# Altium PCB SX1308_GTW_e381v02c.PcbDoc (part 1 of 3)
Units mil, origin at the board's own origin, x right, y up, seen from the top; angles counter-clockwise.
Board outline 2874.02 x 1220.47 mil, 4 copper layers (Top Layer, MidLayer1 - GND, MidLayer2 - Power, Bottom Layer), stack 62.441 mil thick; 180 components, 130 nets, 612 pads, 859 vias.
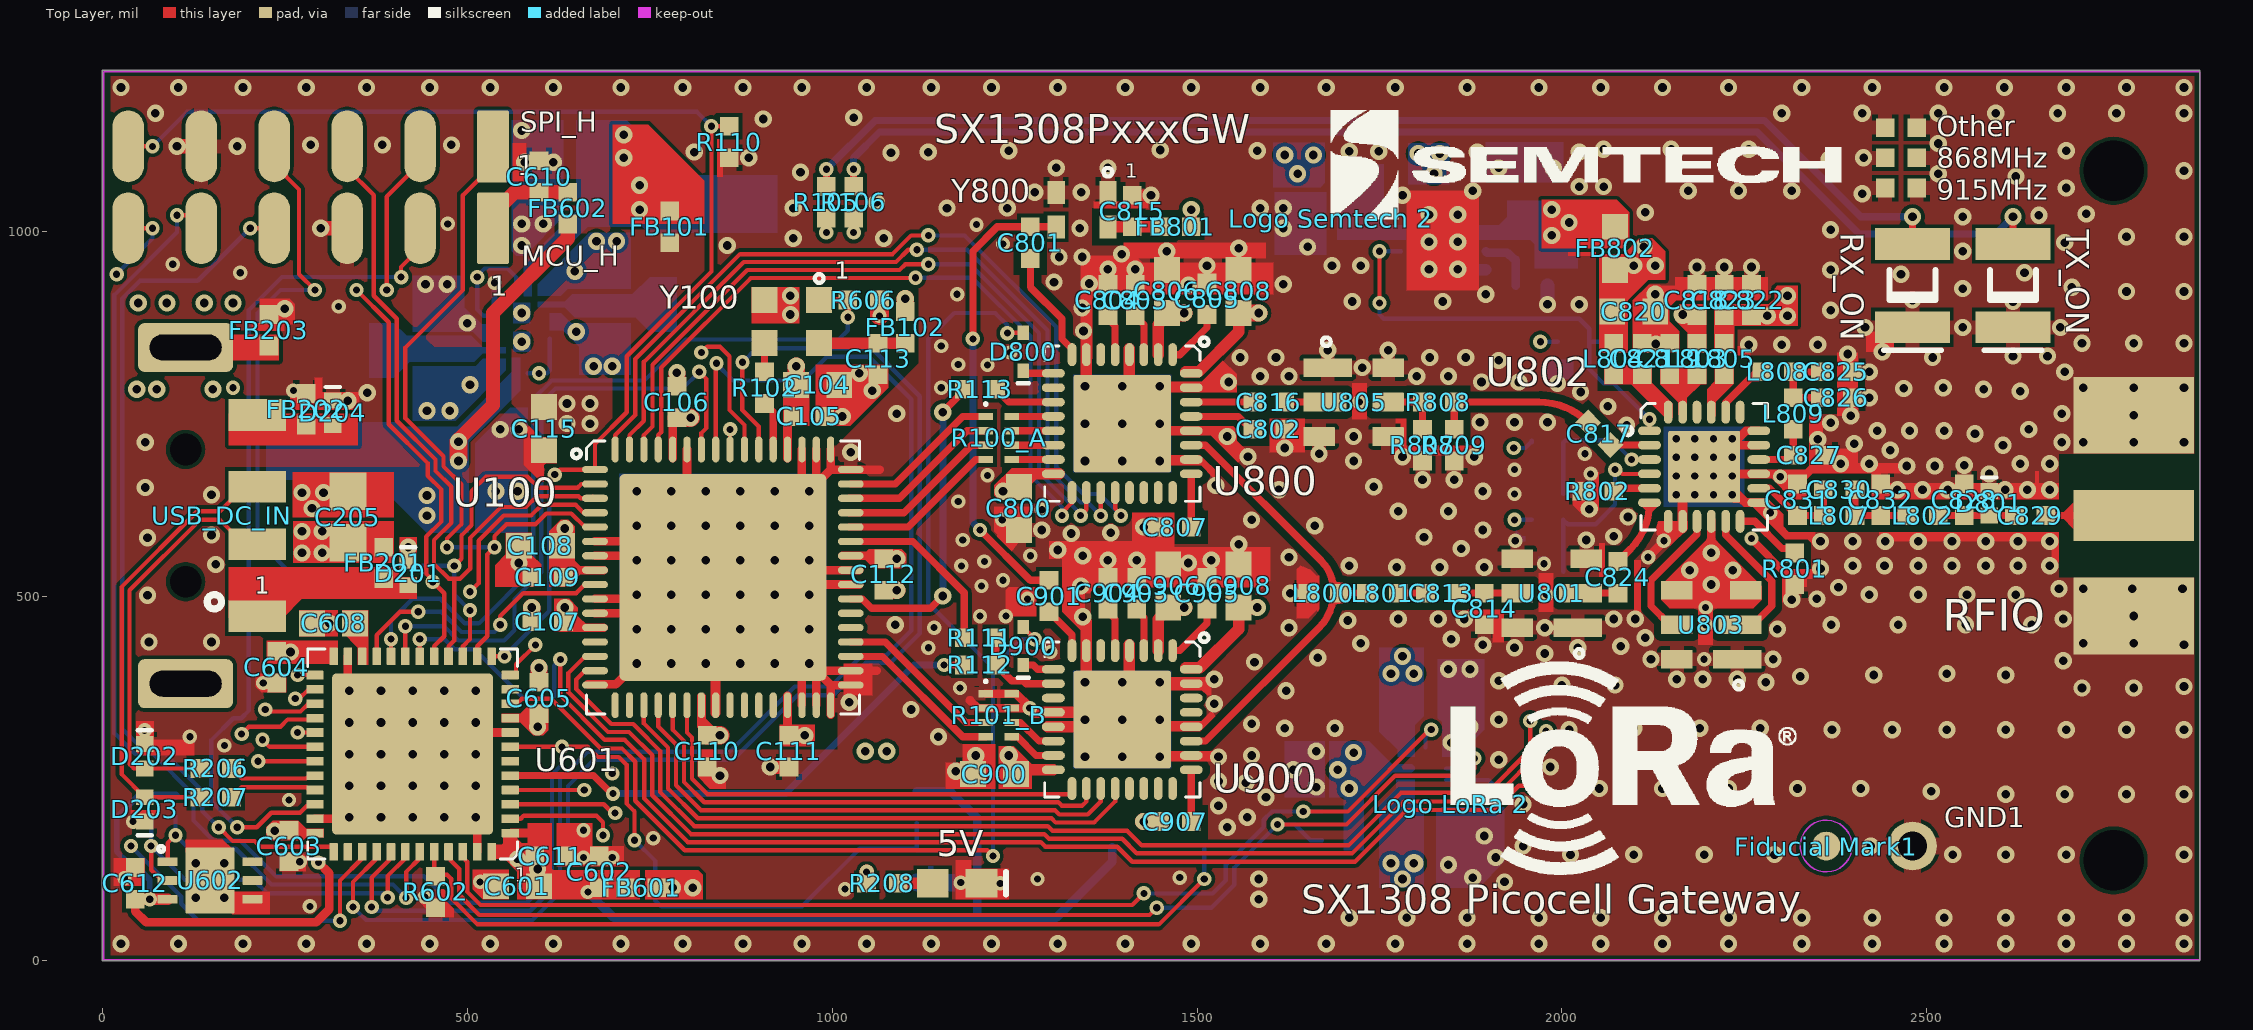
[diagram p0: Top Layer view]
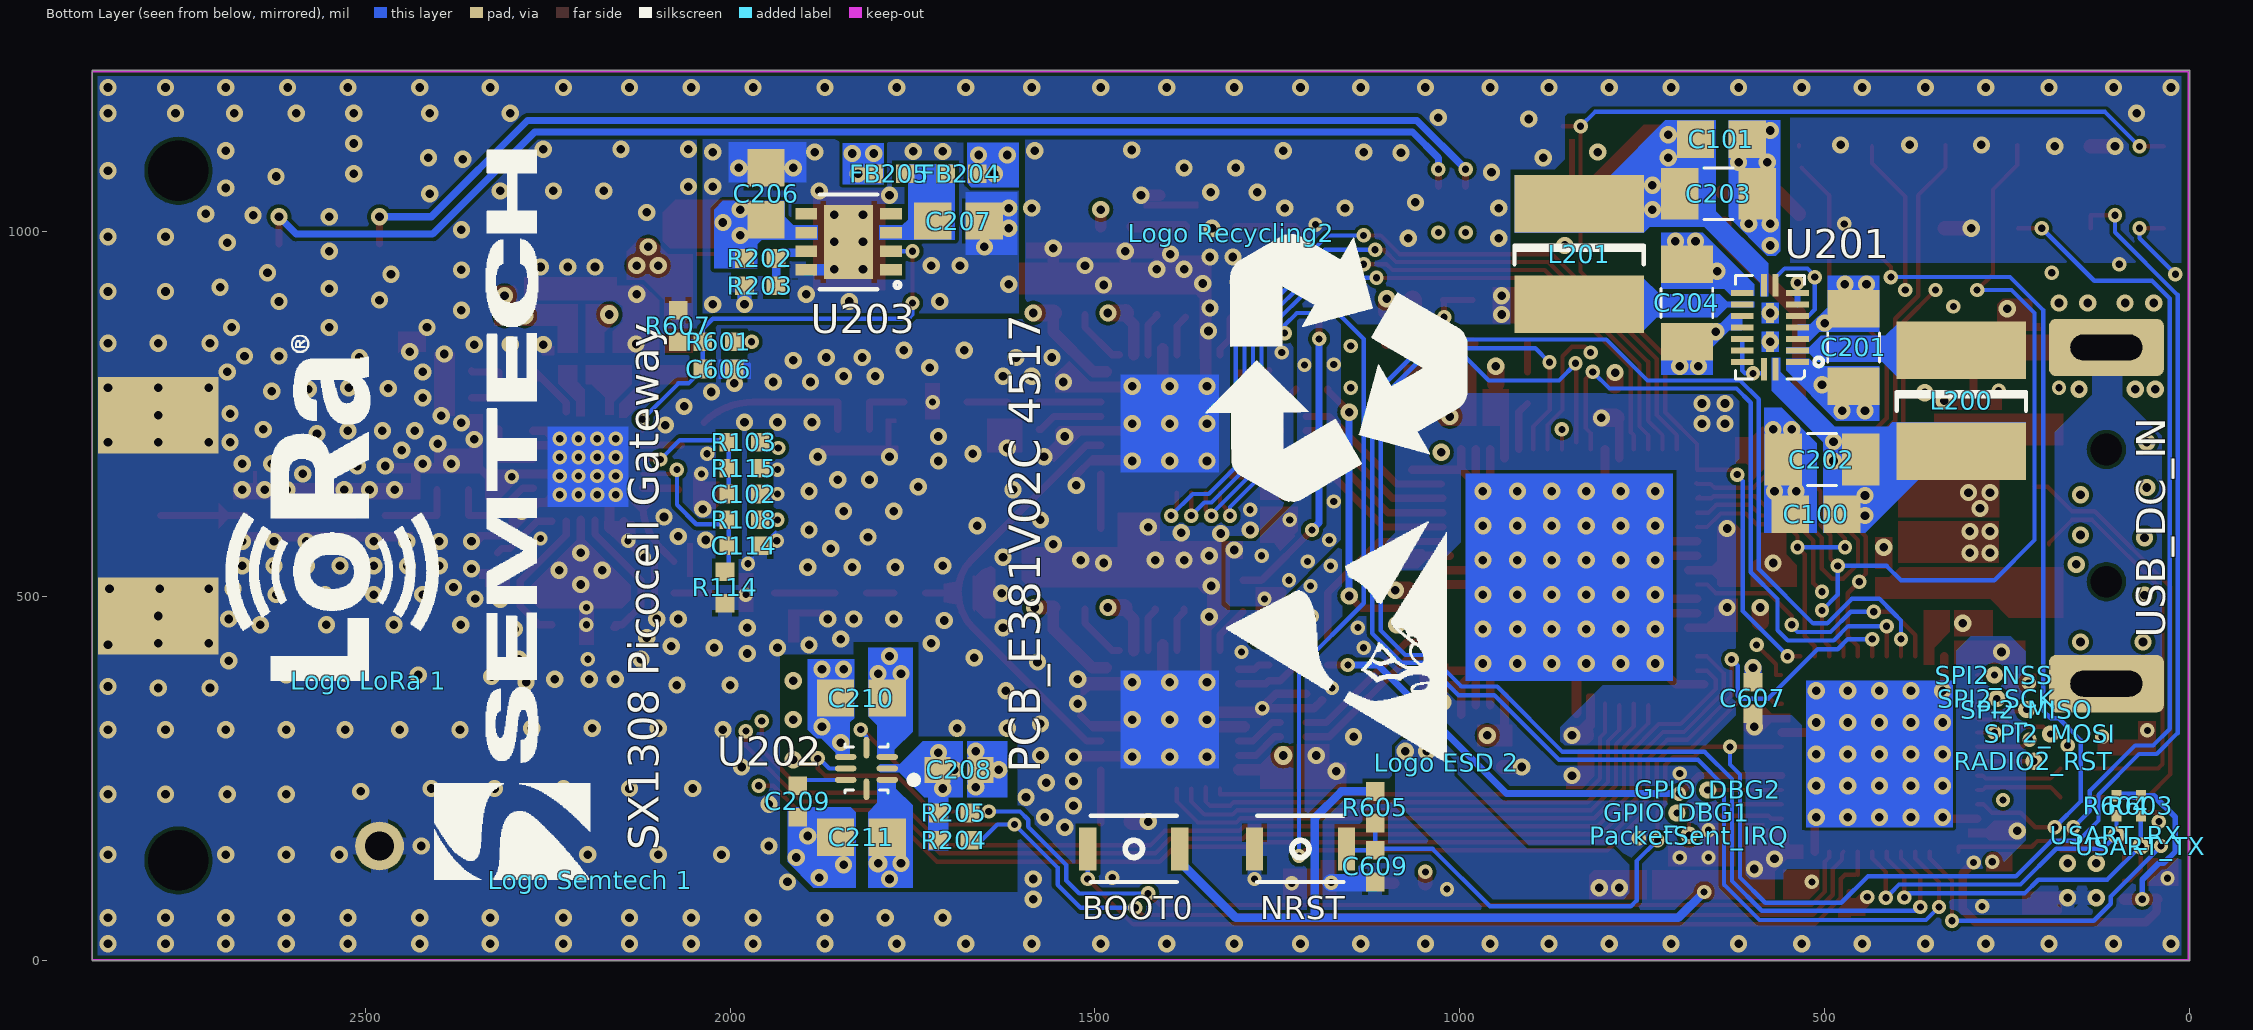
[diagram p1: Bottom Layer view, seen from below]
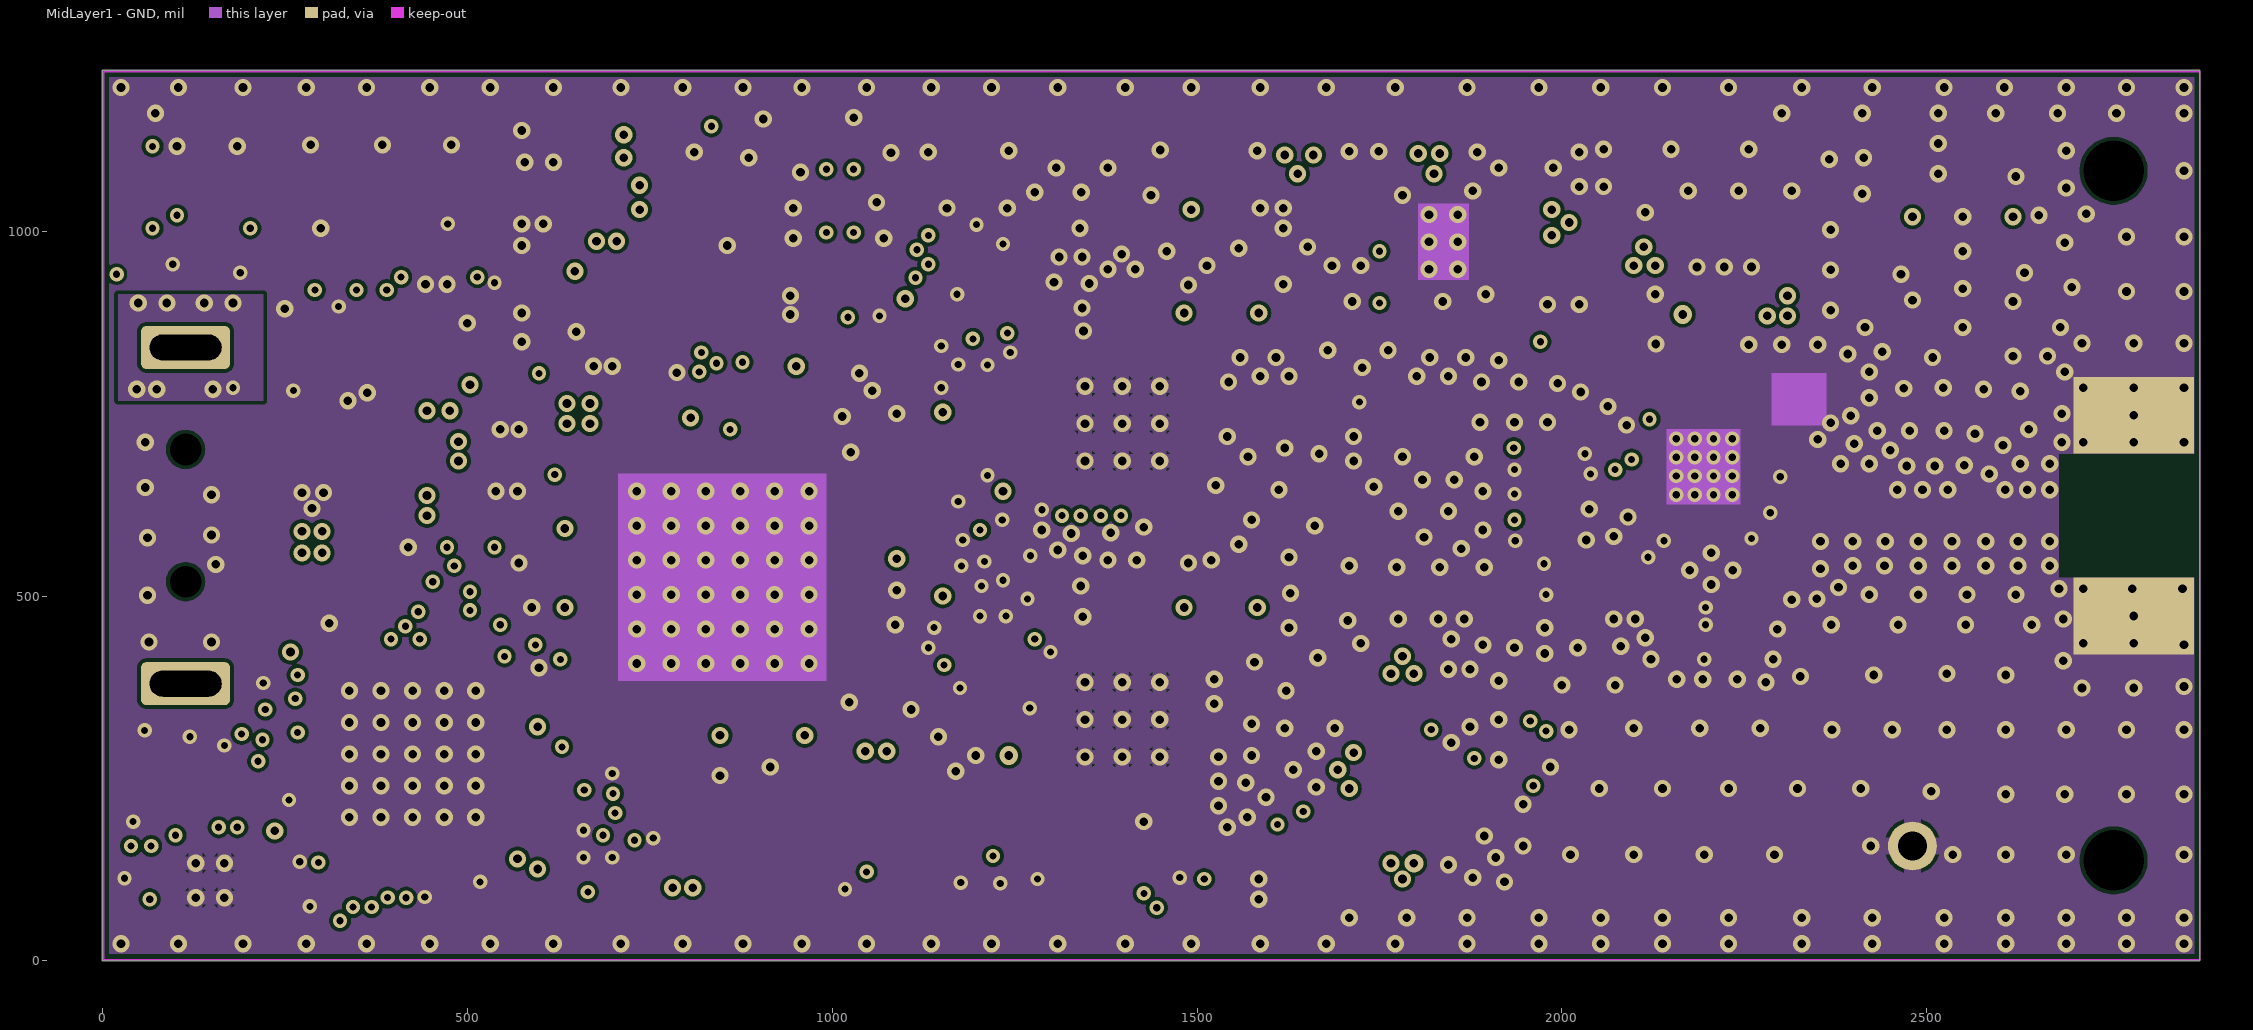
[diagram p2: MidLayer1 - GND]
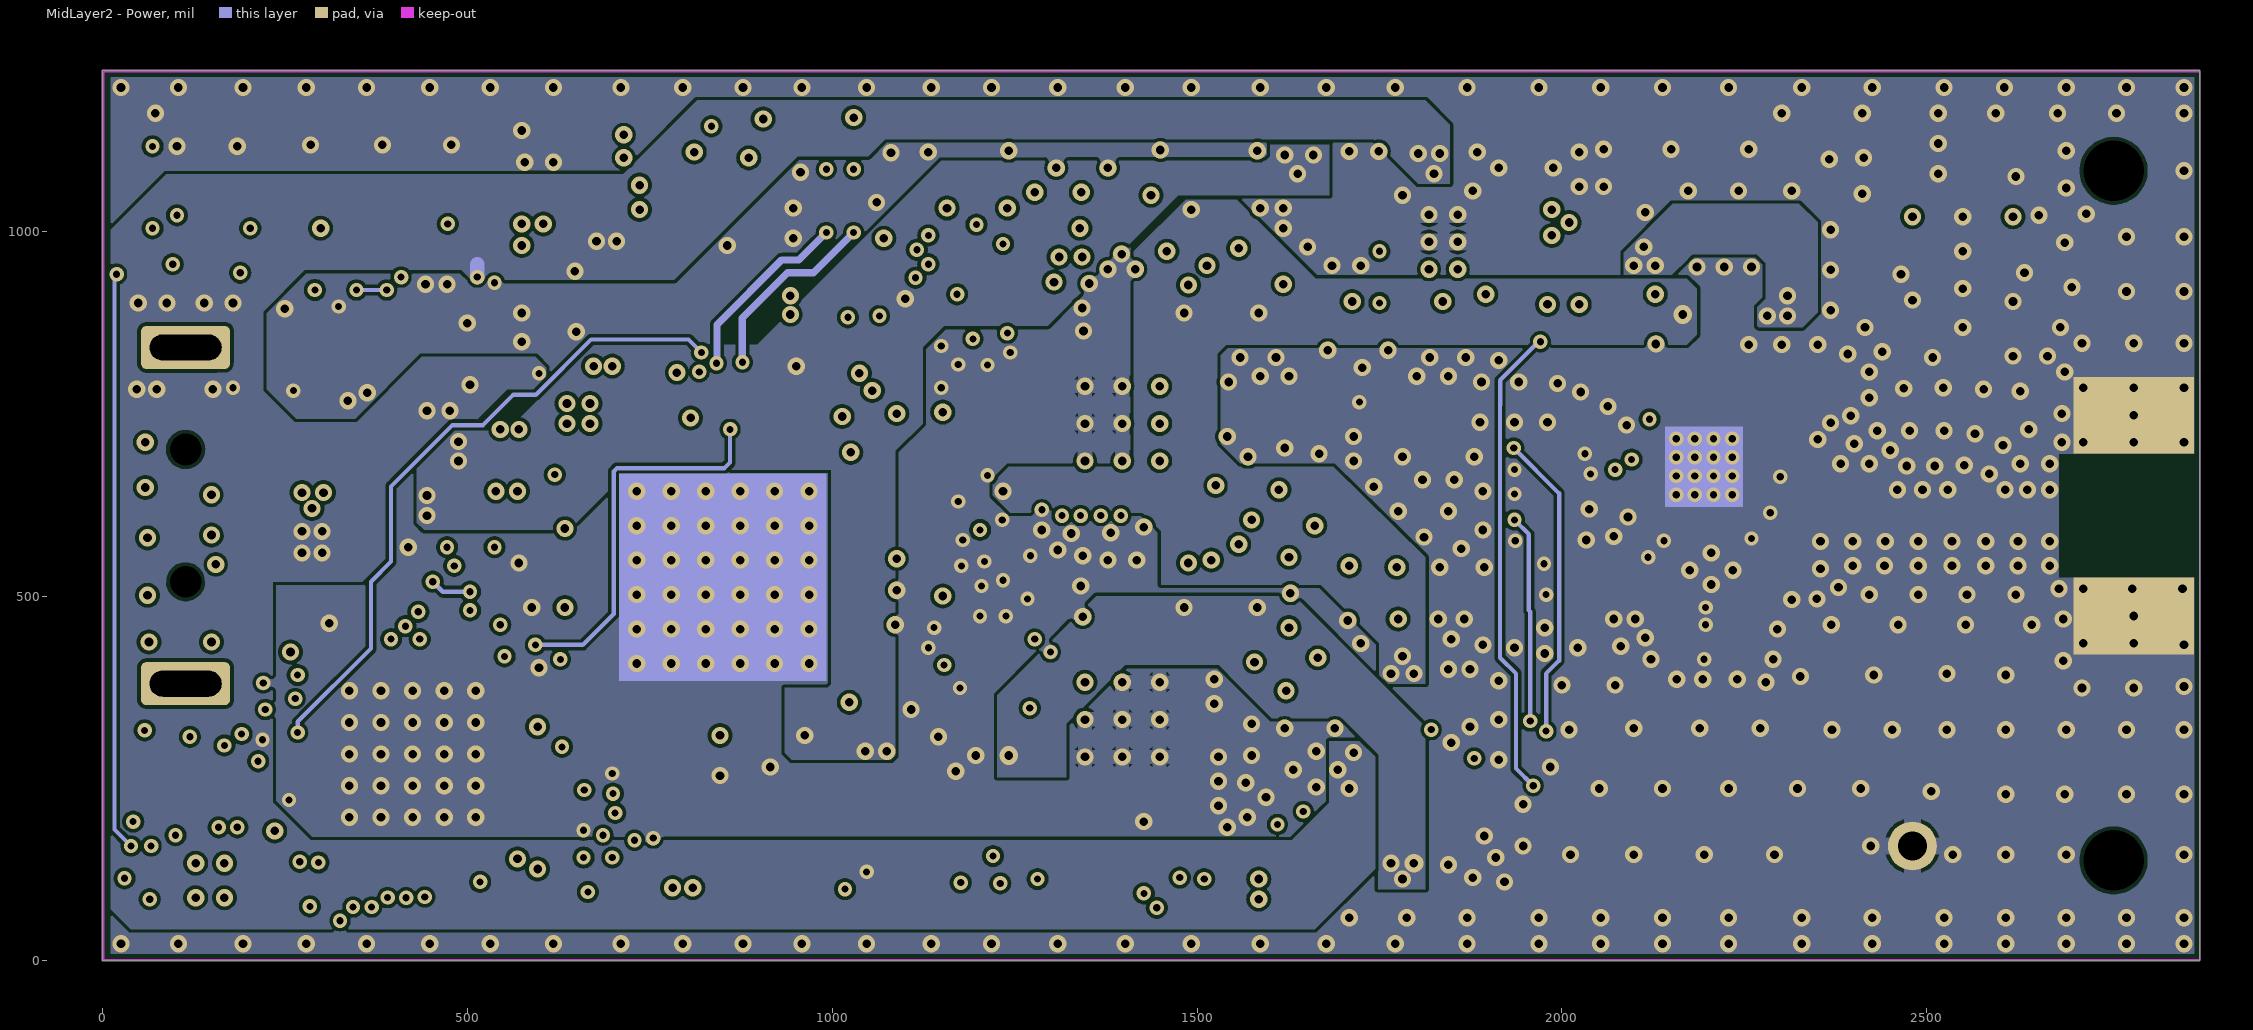
[diagram p3: MidLayer2 - Power]

## Layer stack, top to bottom
Top Layer: signal copper 1.378
Dielectric: core 5.9055, FR-4, Dk 4.3
MidLayer1 - GND: signal copper 0.7087
Dielectric: prepreg 46.4567, FR-4, Dk 4.3
MidLayer2 - Power: signal copper 0.7087
Dielectric: core 5.9055, FR-4, Dk 4.3
Bottom Layer: signal copper 1.378

## Board outline
0,0 2874.02,0 2874.02,1220.47 0,1220.47

## Design rules (kind name [scope] priority, off if disabled: settings)
Clearance Clearance_RF_Area [InNet('GND') And OnLayer('Top Layer') And (InPolygon) vs InNet('NetL8*') or InNet('NetC8*')  or  InNet('NetL9*') or InNet('NetC9*')  or  InNet('NetU8*') or InNet('NetU9*') or  InNet('NetR8*') or InNet('NetR9*')] p1: gap=9.84
Clearance Clearance_DC_Supply [((InPolygon) and  ( InNet('VCCDIG33') or   InNet('VCCDIG18') or  InNet('+5V') or  InNet('VDD5V_USB') or  InNet('VCC_FEM')  or  InNet('VCC_FEM_1')  )   )  AND InComponentClass('SX1301_GTW_e381v02ac_RF_Partt')] p2: gap=5.91
Clearance Clearance_GND [InNet('GND')] p3: gap=5
Clearance "Clearance ALL" [All] p4: gap=5
ComponentClearance "Component Test Pin" [HasFootprint('PIN_SMD')] p1: gap=1.97 collisioncheckmode=3 verticalgap=7.87 showdistances=FALSE
ComponentClearance [All] p2: gap=7.87 collisioncheckmode=3 verticalgap=9.84 showdistances=FALSE
HoleSize [All] p1: absolutevalues=TRUE maxlimit=255.91 minlimit=7.87 maxpercent=80.000 minpercent=20.000
HoleToHoleClearance [All] p1: gap=7.87 allowstackedmicrovias=TRUE
MinimumSolderMaskSliver [All] p1: minsoldermaskwidth=1.97
PlaneClearance [All] p1: clearance=7.87
PlaneConnect [All] p1: planeconnectstyle=Direct reliefexpansion=20 reliefentries=4 reliefconductorwidth=10 reliefairgap=10
PolygonConnect "PolygonConnect DGND 0402" [InNet('GND') vs HasFootprint('rlc_402_smd')] p1: connectstyle=Relief reliefconductorwidth=19.68 reliefentries=4 polygonreliefangle="90 Angle"
PolygonConnect "PolygonConnect GND SMD" [InNet('GND') vs HasFootprint('MSOP8') or HasFootprint('EXB28V')  or HasFootprint('MLPD-6') or HasFootprint('DCC6C_3.0x3.0mm')  or HasFootprint('rlc_1206_smd capa pol') or HasFootprint('rlc_603_smd')  or hasFootprint('rlc_805_smd') or hasFootprint('rlc_1206_smd') or HasFootprint('rlc_1210_smd')   or HasFootprint('SC70-6') or HasFootprint('SOT23-5') or HasFootprint('DCC6C_3.0x3.0mm') or HasFootprint('L4818')  or HasFootprint('LGM676 LED')   or HasFootprint('VQFN64_9X9MM')   or HasFootprint('MLPQ-W18') or HasFootprint('SOP8_N') or HasFootprint('HWSON10_3.0X3.0MM')   or HasFootprint('SOT-343')  or HasFootprint('TCXO 2.5_2.0mm')  or HasFootprint('VQFN32_5X5MM')   or  HasFootprint('TCXO 2.0X1.6MM')     or HasFootprint('vqfn24_4x4mm RF')   or  HasFootprint('HDR1X6_SMD') or  HasFootprint('HDR1X3_SMD')   or HasFootprint('SLP1006P2T')  or HasFootprint('CD1608-0603')   or HasFootprint('CD3224')  or HasFootprint('KXT_series_switch_3.5x2.0mm')  or HasFootprint('DFN6_3X3MM')] p2: connectstyle=Relief reliefconductorwidth=19.68 reliefentries=4 polygonreliefangle="90 Angle"
PolygonConnect PolygonConnect_comp_diverse [InNet('GND') vs HasFootprint('CD1608-0603') or HasFootprint('SMA Straight') or  HasFootprint('bridge_254mm')  or   HasFootprint('HDR1X2')  or  HasFootprint('HDR1X6')   or  HasFootprint('MLPD-8 3x3mm')    or  HasFootprint('pin_1mm') or  HasFootprint('pin_0.9mm')] p3: connectstyle=Relief reliefconductorwidth=23.62 reliefentries=4 polygonreliefangle="90 Angle"
PolygonConnect PolygonConnect_all [All] p4: connectstyle=Direct reliefconductorwidth=23.62 reliefentries=4 polygonreliefangle="90 Angle"
RoomDefinition SX1308_GTW_e381v02c_STM32_MCU [InComponentClass('SX1308_GTW_e381v02c_STM32_MCU')] p1: confinementstyle=ConfineOut formatcopy=TRUE lockcomponents=FALSE outline 6318.9,-334.65 6318.9,688.98 7106.3,688.98 7106.3,-334.65
RoomDefinition SX1308_GTW_e381v02c_RF_Part [InComponentClass('SX1308_GTW_e381v02c_RF_Part')] p2: confinementstyle=ConfineOut formatcopy=TRUE lockcomponents=FALSE outline 5078.74,-328.74 5078.74,694.88 6062.99,694.88 6062.99,-328.74
RoomDefinition SX1308_GTW_e381v02c_SX1308_part [InComponentClass('SX1308_GTW_e381v02c_SX1308_part')] p3: confinementstyle=ConfineOut formatcopy=TRUE lockcomponents=FALSE outline 5078.74,950.79 5078.74,1994.09 6043.31,1994.09 6043.31,950.79
RoomDefinition SX1308_GTW_e381v02c_Power [InComponentClass('SX1308_GTW_e381v02c_Power')] p4: confinementstyle=ConfineOut formatcopy=TRUE lockcomponents=FALSE outline 4055.12,-328.74 4055.12,694.88 4862.2,694.88 4862.2,-328.74
RoomDefinition SX1308_GTW_e381v02c_Top [InComponentClass('SX1308_GTW_e381v02c_Top')] p5: confinementstyle=ConfineOut formatcopy=TRUE lockcomponents=FALSE outline 4862.2,950.79 4862.2,1994.09 4074.8,1994.09 4074.8,950.79
RoutingVias [All] p1: holewidth=11.81 width=23.62 viastyle="Through Hole" minholewidth=9.84 minwidth=17.72 maxholewidth=15.75 maxwidth=31.5
SilkToSilkClearance [All] p1: silktosilkclearance=1.97
SilkscreenOverComponentPads [All] p1: minsilkscreentomaskgap=1.97
SolderMaskExpansion [All] p1: expansion=1.97
Width "Width GND" [InNet('GND')] p1: maxlimit=118.11 minlimit=7.87 preferedwidth=15.75
Width Width_VCC [InNet('VCCDIG33') or   InNet('VCCDIG18') or  InNet('+5V') or  InNet('VDD5V_USB') or  InNet('VCC_FEM')  or  InNet('VCC_FEM_1')] p2: maxlimit=157.48 minlimit=5.91 preferedwidth=31.5
Width "Width All" [All] p3: maxlimit=78.74 minlimit=3.94 preferedwidth=5.91
20 further rules are at their usual default settings.

## Classes and differential pairs
component class SX1308_GTW_e381v02c_RF_Part: C800 C801 C802 C803 C804 C805 C806 C807 C808 C813 C814 C815 C816 C817 C818 C819 C820 C821 C822 C823 C824 C825 C826 C827 C828 C829 C830 C831 C832 C843 C849 C900 C901 C903 C904 C905 C906 C907 C908 D800 D801 D900 FB801 FB802 L800 L801 L802 L803 L804 L805 L807 L808 L809 R801 R802 R807 R808 R809 RFIO U800 U801 U802 U803 U805 U900 Y800
component class SX1308_GTW_e381v02c_Power: 5V C201 C202 C203 C204 C205 C206 C207 C208 C209 C210 C211 D201 D202 D203 D204 FB201 FB202 FB203 FB204 FB205 GND1 L200 L201 R202 R203 R204 R205 R206 R207 R208 U201 U202 U203 USB_DC_IN
component class SX1308_GTW_e381v02c_Top: 868MHz 915MHz "Fiducial Mark1" "Logo ESD 2" "Logo LoRa 1" "Logo LoRa 2" "Logo Recycling2" "Logo Semtech 1" "Logo Semtech 2" "Logo Semtech  3" Other
component class SX1308_GTW_e381v02c_SX1308_part: C100 C101 C102 C104 C105 C106 C107 C108 C109 C110 C111 C112 C113 C114 C115 FB101 FB102 R100_A R101_B R102 R103 R105 R106 R108 R110 R111 R112 R113 R114 R115 RX_ON TX_ON U100 Y100
component class SX1308_GTW_e381v02c_STM32_MCU: BOOT0 C601 C602 C603 C604 C605 C606 C607 C608 C609 C610 C611 C612 FB601 FB602 GPIO_DBG1 GPIO_DBG2 MCU_H NRST PacketSent_IRQ R601 R602 R603 R604 R605 R606 R607 RADIO2_RST SPI2_MISO SPI2_MOSI SPI2_NSS SPI2_SCK SPI_H U601 U602 USART_RX USART_TX

## Components (designator, comment, footprint, x,y, rotation, side; value= is the part's Value field where it differs from the comment)
5V "LED" CD1608-0603 1171.26,106.3 r0 top
868MHz "Resistor" RLC_402_SMD 2464.57,1100.39 r0 top
915MHz "Resistor" RLC_402_SMD 2464.57,1059.06 r0 top
BOOT0 "SPST Switch" KXT_series_switch_3.5x2.0mm 1446.85,153.54 r180 bottom locked
C100 "Cap" rlc_805_smd 511.81,612.2 r180 bottom
C101 "Cap" rlc_805_smd 641.73,1125.98 r0 bottom
C102 "Cap" RLC_402_SMD 1980.31,639.76 r0 bottom
C104 "Cap" rlc_603_smd 980.31,789.37 r180 top
C105 "Cap" RLC_402_SMD 968.5,746.06 r180 top
C106 "Cap" RLC_402_SMD 787.4,765.75 r270 top
C107 "Cap" RLC_402_SMD 610.24,464.57 r0 top
C108 "Cap" rlc_603_smd 600.39,568.9 r0 top
C109 "Cap" RLC_402_SMD 610.24,525.59 r0 top
C110 "Cap" RLC_402_SMD 828.74,287.4 r90 top
C111 "Cap" RLC_402_SMD 940.94,287.4 r90 top
C112 "Cap" RLC_402_SMD 1070.87,529.53 r90 top
C113 "Cap" RLC_402_SMD 1062.99,824.8 r90 top
C114 "Cap" RLC_402_SMD 1980.31,568.9 r0 bottom
C115 "Cap" rlc_603_smd 605.31,729.33 r270 top
C201 "Cap" C1206 460.63,840.55 r90 bottom
C202 "Cap" C1206 503.94,687.01 r0 bottom
C203 "Cap" C1206 645.67,1051.18 r180 bottom
C204 "Cap" C1206 688.98,901.57 r270 bottom
C205 "Cap" rlc_805_smd 336.61,608.27 r90 top
C206 "Cap" rlc_805_smd 1950.79,1051.18 r90 bottom
C207 "Cap" rlc_805_smd 1687.01,1013.78 r180 bottom
C208 "Cap" rlc_603_smd 1686.18,261.81 r180 bottom
C209 "Cap" RLC_402_SMD 1907.48,218.5 r90 bottom
C210 "Cap" rlc_805_smd 1820.04,360.24 r0 bottom
C211 "Cap" rlc_805_smd 1820.04,169.29 r0 bottom
C601 "Cap" rlc_603_smd 568.9,102.36 r0 top
C602 "Cap" RLC_402_SMD 681.1,122.05 r270 top
C603 "Cap" RLC_402_SMD 255.91,157.48 r90 top
C604 "Cap" RLC_402_SMD 239.17,402.56 r90 top
C605 "Cap" RLC_402_SMD 598.43,360.24 r270 top
C606 "Cap" RLC_402_SMD 2015.75,811.02 r0 bottom
C607 "Cap" rlc_402_smd 598.43,360.24 r270 bottom
C608 "Cap" rlc_603_smd 316.93,462.6 r0 top
C609 "Cap" RLC_402_SMD 1116.14,129.92 r90 bottom
C610 "Cap" RLC_402_SMD 598.43,1074.8 r270 top
C611 "Cap" RLC_402_SMD 614.17,143.7 r180 top
C612 "Cap" rlc_402_smd 45.28,106.3 r270 top
C800 "Cap" rlc_603_smd 1255.91,620.08 r90 top
C801 "Cap" RLC_402_SMD 1271.65,984.25 r270 top
C802 "Cap" RLC_402_SMD 1598.43,728.35 r0 top
C803 "Cap" RLC_402_SMD 1415.35,905.51 r270 top
C804 "Cap" RLC_402_SMD 1377.95,905.51 r90 top
C805 "Cap" RLC_402_SMD 1513.78,907.48 r90 top
C806 "Cap" rlc_603_smd 1458.66,917.32 r270 top
C807 "Cap" RLC_402_SMD 1470.47,594.49 r0 top
C808 "Cap" rlc_603_smd 1557.09,917.32 r270 top
C813 "Cap" RLC_402_SMD 1834.65,503.94 r0 top
C814 "Cap" RLC_402_SMD 1893.7,482.28 r270 top
C815 "Cap" RLC_402_SMD 1411.42,1027.56 r270 top
C816 "Cap" RLC_402_SMD 1598.43,765.75 r0 top
C817 "Cap" RLC_402_SMD 2051.18,722.44 r315 top
C818 "Cap" RLC_402_SMD 2185.04,905.51 r270 top
C819 "Cap" RLC_402_SMD 2147.64,824.8 r270 top
C820 "Cap" rlc_603_smd 2098.43,889.76 r180 top
C821 "Cap" RLC_402_SMD 2110.24,824.8 r270 top
C822 "Cap" RLC_402_SMD 2259.84,905.51 r270 top
C823 "Cap" RLC_402_SMD 2222.44,905.51 r270 top
C824 "Cap" RLC_402_SMD 2076.77,525.59 r90 top
C825 "Cap" RLC_402_SMD 2375.98,807.09 r180 top
C826 "Cap" RLC_402_SMD 2375.98,771.65 r180 top
C827 "Cap" RLC_402_SMD 2338.58,692.91 r180 top
C828 "Cap" rlc_402_smd 2551.18,631.89 r90 top
C829 "Cap" RLC_402_SMD 2641.73,610.24 r0 top
C830 "Cap" RLC_402_SMD 2379.92,645.67 r180 top
C831 "Cap" RLC_402_SMD 2322.83,631.89 r270 top
C832 "Cap" RLC_402_SMD 2437.01,631.89 r90 top
C900 "Cap" rlc_603_smd 1222.44,255.91 r0 top
C901 "Cap" RLC_402_SMD 1297.24,500 r90 top
C903 "Cap" RLC_402_SMD 1417.32,503.94 r270 top
C904 "Cap" RLC_402_SMD 1377.95,503.94 r90 top
C905 "Cap" RLC_402_SMD 1513.78,503.94 r90 top
C906 "Cap" rlc_603_smd 1460.63,513.78 r270 top
C907 "Cap" RLC_402_SMD 1470.47,190.94 r0 top
C908 "Cap" rlc_603_smd 1557.09,513.78 r270 top
D201 "RClamp0531T" SLP1006P2T 419.29,531.5 r90 top
D202 "RClamp0531T" SLP1006P2T 58.07,280.51 r90 top
D203 "RClamp0531T" SLP1006P2T 58.07,207.68 r270 top
D204 "RClamp0531T" SLP1006P2T 315.94,750.98 r90 top
D800 "D Schottky" SOD523 1261.81,834.65 r90 top
D801 "RClamp0531T" SLP1006P2T 2585.63,626.97 r90 top
D900 "D Schottky" SOD523 1261.81,431.5 r90 top
FB101 "Ferrite beads" RLC_402_SMD 777.56,1005.91 r270 top
FB102 "Ferrite beads" RLC_402_SMD 1100.39,868.11 r270 top
FB201 "Ferrite beads" RLC_402_SMD 385.83,545.28 r90 top
FB202 "Ferrite beads" RLC_402_SMD 279.53,755.91 r90 top
FB203 "Ferrite beads" RLC_402_SMD 228.35,864.17 r270 top
FB204 "Ferrite beads" RLC_402_SMD 1683.07,1078.74 r0 bottom
FB205 "Ferrite beads" RLC_402_SMD 1781.5,1078.74 r180 bottom
FB601 "Ferrite beads" RLC_402_SMD 738.19,100.39 r180 top
FB602 "Ferrite beads" RLC_402_SMD 637.8,1031.5 r270 top
FB801 "Ferrite beads" RLC_402_SMD 1470.47,1005.91 r180 top
FB802 "Ferrite beads" rlc_603_smd 2072.83,976.38 r270 top
"Fiducial Mark1" "Logo symbol  BOT" fiducial_mark_signal_top 2362.2,157.48 r90 top locked
GND1 "Test Pin" pin_1mm 2480.31,157.48 r90 top
GPIO_DBG1 "Test Pin" PIN_SMD 702.76,202.76 r270 bottom
GPIO_DBG2 "Test Pin" PIN_SMD 660.43,234.25 r270 bottom
L200 "Inductor" L4818 312.99,767.72 r0 bottom
L201 "Inductor" L4818 836.61,968.5 r0 bottom
L800 "Inductor" RLC_402_SMD 1673.23,503.94 r0 top
L801 "Inductor" RLC_402_SMD 1753.94,503.94 r0 top
L802 "Inductor" rlc_402_smd 2494.09,610.24 r0 top
L803 "Inductor" RLC_402_SMD 2185.04,824.8 r90 top
L804 "Inductor" RLC_402_SMD 2070.87,824.8 r90 top
L805 "Inductor" RLC_402_SMD 2222.44,824.8 r90 top
L807 "Inductor" RLC_402_SMD 2379.92,610.24 r0 top
L808 "Inductor" RLC_402_SMD 2295.28,807.09 r0 top
L809 "Inductor" RLC_402_SMD 2316.93,750 r270 top
"Logo ESD 2" "Logo symbol" "Logo ESD" 1017.72,271.65 r90 bottom
"Logo LoRa 1" "Logo symbol TOP" "LOGO LORA SIZE3" 2495.08,383.86 r90 bottom
"Logo LoRa 2" "Logo symbol TOP" "LOGO LORA SIZE3" 1847.44,214.57 r0 top
"Logo Recycling2" "Logo symbol" "Logo Recycling1" 1312.99,998.03 r270 bottom
"Logo Semtech 1" "Logo symbol TOP" logo_semtech_horiz_size3 2191.93,111.22 r90 bottom
"Logo Semtech 2" "Logo Semtech  Bot2" logo_semtech_horiz_size2 1683.07,1017.72 r0 top
MCU_H "Header 6" HDR1X6_SMD 535.43,1003.94 r180 top locked
NRST "SPST Switch" KXT_series_switch_3.5x2.0mm 1218.5,153.54 r0 bottom locked
Other "Resistor" RLC_402_SMD 2464.57,1141.73 r0 top
PacketSent_IRQ "Test Pin" PIN_SMD 686.02,172.24 r270 bottom
R100_A "EXBN8VxxxJX" EXB28V 1228.35,716.54 r270 top
R101_B "EXBN8VxxxJX" EXB28V 1228.35,336.61 r270 top
R102 "Resistor" RLC_402_SMD 907.48,785.43 r90 top
R103 "Resistor" RLC_402_SMD 1980.31,710.63 r0 bottom
R105 "Resistor" RLC_402_SMD 992.13,1039.37 r270 top
R106 "Resistor" RLC_402_SMD 1029.53,1039.37 r270 top
R108 "Resistor" RLC_402_SMD 1980.31,604.33 r0 bottom
R110 "Resistor" RLC_402_SMD 859.25,1122.05 r90 top
R111 "Resistor" RLC_402_SMD 1202.76,442.91 r0 top
R112 "Resistor" RLC_402_SMD 1202.76,405.51 r0 top
R113 "Resistor" RLC_402_SMD 1202.76,783.46 r0 top
R114 "Resistor" rlc_402_smd 2006.89,511.81 r270 bottom
R115 "Resistor" rlc_402_smd 1980.31,675.2 r180 bottom
R202 "Resistor" RLC_402_SMD 1958.66,962.6 r180 bottom
R203 "Resistor" RLC_402_SMD 1958.66,925.2 r0 bottom
R204 "Resistor" RLC_402_SMD 1692.91,165.35 r180 bottom
R205 "Resistor" RLC_402_SMD 1692.91,202.76 r180 bottom
R206 "Resistor" RLC_402_SMD 155.51,263.78 r0 top
R207 "Resistor" RLC_402_SMD 155.51,224.41 r0 top
R208 "Resistor" RLC_402_SMD 1068.9,106.3 r0 top
R601 "Resistor" RLC_402_SMD 2015.75,848.43 r0 bottom
R602 "Resistor" RLC_402_SMD 456.69,94.49 r90 top
R603 "Resistor" rlc_201_smd 66.93,212.6 r90 bottom
R604 "Resistor" rlc_201_smd 100.39,212.6 r90 bottom
R605 "Resistor" RLC_402_SMD 1116.14,210.63 r90 bottom
R606 "Resistor" rlc_402_smd 1043.31,905.51 r180 top
R607 "Resistor" rlc_402_smd 2070.87,870.08 r270 bottom
R801 "Resistor" RLC_402_SMD 2318.9,537.4 r270 top
R802 "Resistor" RLC_402_SMD 2049.21,643.7 r180 top
R807 "Resistor" RLC_402_SMD 1809.06,706.69 r90 top
R808 "Resistor" RLC_402_SMD 1830.71,765.75 r0 top
R809 "Resistor" RLC_402_SMD 1852.36,706.69 r90 top
RADIO2_RST "Test Pin" PIN_SMD 213.58,273.62 r270 bottom
RFIO "SMA" SMA_END_LAUNCH_1.6MM_6.35MM 2783.46,610.24 r0 top locked
RX_ON "LED" CD3224 2480.31,925.2 r270 top
SPI2_MISO "Test Pin" PIN_SMD 223.43,344.49 r270 bottom
SPI2_MOSI "Test Pin" PIN_SMD 190.94,311.02 r270 bottom
SPI2_NSS "Test Pin" PIN_SMD 267.72,391.73 r270 bottom
SPI2_SCK "Test Pin" PIN_SMD 264.33,359.49 r270 bottom
SPI_H "Header 6" HDR1X6_SMD 535.43,1116.14 r180 top locked
TX_ON "LED" CD3224 2618.11,925.2 r270 top
U100 "SX1308" VQFN64_9X9MM 850.39,525.59 r0 top
U201 "SC283" MLPQ-W18 575.29,868.11 r0 bottom
U202 "SC560H" MLPQ-UT8 1813.15,263.78 r0 bottom
U203 "SC4212" "MLPD-8 3X3MM" 1837.6,985.24 r0 bottom
U601 "STM32F401CDU6" UFQFPN48_7X7MM 425.2,283.46 r180 top locked
U602 "TO136" DFN6_3X3MM 147.64,110.24 r0 top
U800 "SX1257" VQFN32_5X5MM 1397.64,736.22 r270 top
U801 "SAW Filter" DCC6C_3.0x3.0mm 1986.22,503.94 r180 top
U802 "SE2435L" "VQFN24_4X4MM RF" 2194.88,677.17 r0 top
U803 "SAW Filter" DCC6C_3.0x3.0mm 2204.72,460.63 r180 top
U805 "SAW Filter" DCC6C_3.0x3.0mm 1714.57,765.75 r0 top
U900 "SX1257" VQFN32_5X5MM 1397.64,330.71 r270 top
USART_RX "Test Pin" PIN_SMD 100.39,172.24 r270 bottom
USART_TX "Test Pin" PIN_SMD 66.93,157.48 r270 bottom
USB_DC_IN "USB Type-A SMD" "KEYSTONE USB TYPE 931" 0,610.24 r0 top locked
Y100 "2520 Type - NDK" "TCXO 2.5X2.0MM" 944.88,875.98 r180 top
Y800 "TCXO" "TCXO 2.0X1.6MM" 1342.52,1029.53 r180 top

## Footprints (in the part's own frame and the unit in brackets; to place one, negate y for a bottom-side part, rotate by r counter-clockwise, add the part's x,y. Pads: shape width x height; smd on the part's side, far side on the other; paste and mask are expansions set on the pad)
C1206 [mm] "C1206"
  rect 1.3x1.801 smd mask+0.05: 1(-1.35,0) 2(1.35,0)
  silkscreen extent -0.5,-0.9 0.5,0.9
CD1608-0603 [mm] "Chip Diode; Body 1.6 x 0.8 mm (LxW typ)"
  rect 1.1x1 smd mask+0.05: 1(-0.85,0) 2(0.85,0)
  silkscreen extent 1.7,-0.4 1.7,0.4
CD3224 [mm] "Chip Diode; Body 3.2 x 2.4mm (LxW typ)"
  rect 1.1x2.6 smd mask+0.05: 1(-1.45,0) 2(1.45,0)
  silkscreen extent -0.55,-1 2.25,1, body extent -1.62,-1.22 1.62,1.22, height 1.35
DCC6C_3.0x3.0mm [mm] "DCC6C footprint, 3.0x3.0mm"
  rrect5% 1.7x0.65 smd mask+0.05: 1(-0.9,1.2)
  rrect5% 1.5x0.65 smd mask+0.05: 2(-1,0)
  rrect5% 1.1x0.65 smd mask+0.05: 3(-1.2,-1.2) 4(1.2,-1.2) 5(1.2,0) 6(1.2,1.2)
  silkscreen extent -1.1,1.95 -0.8,2.25, body extent -1.5,-1.5 1.5,1.5, height 1
DFN6_3X3MM [mm] "6 Leads, Body 6x3mm, pitch 0.65mm, DFN6"
  rrect20% 0.7x0.3 smd paste+0 mask+0.05: 1(-1.475,0.65) 2(-1.475,0) 3(-1.475,-0.65) 4(1.475,-0.65) 5(1.475,0) 6(1.475,0.65)
  rrect5% 1.7x2.3 smd paste-2 mask+0.05: 7(0,0)
  silkscreen extent -1.8,1 -1.6,1.2, body extent -1.5,-1.5 1.5,1.5, height 1
EXB28V [mm] "Chip Resistor Array, (0402x4); SM; 8 Leads; Body 2.10 x 1.10 mm (LxW max)"
  rect 0.25x0.5 smd mask+0.05: 1(-0.75,-0.45) 2(-0.25,-0.45) 3(0.25,-0.45) 4(0.75,-0.45) 5(0.75,0.45) 6(0.25,0.45) 7(-0.25,0.45) 8(-0.75,0.45)
  silkscreen extent -1.23,-0.5 -1.13,-0.4, body extent -0.92,-0.75 0.92,0.75, height 0.45
fiducial_mark_signal_top [mm] "Fiducial mark for automatic assembly"
  round 1 smd paste-2 mask+0.5: 1(0,0)
  Top Layer keep-out circle w0.05: c0,0 r0.9
  body extent -0.91,-0.91 0.91,0.91, height 1
HDR1X6_SMD [mm] "Connector; Header; 6 Position; SMD"
  rrect10% 1.1x2.5 smd paste-3 mask+0.05: 1(0,0)
  oval 1.1x2.5 smd paste-3 mask+0.05: 2(2.54,0) 3(5.08,0) 4(7.62,0) 5(10.16,0) 6(12.7,0)
  body extent -0.6,-1.3 13.3,1.3, height 10
"KEYSTONE USB TYPE 931" [mm] "Connector Keystone; USB 2.0, Type A, SM; 4Position; Right Angle"
  rect 2x1.1 smd mask+0.05: 1(5.4,-3.5) 2(5.4,-1) 3(5.4,1) 4(5.4,3.5)
  rrect25% 3.3x1.7 / inner rrect25% 3.1x1.5 / far side rrect25% 4x2 hole 0.9 slot 2.5 at 0 deg paste-2 mask+0.05: 5(2.9,-5.85) 6(2.9,5.85)
  round 0 hole 1.1 unplated mask+0.05: NPTH1(2.9,2.3)
  round 0 hole 1.1 unplated paste+0 mask+0.05: NPTH2(2.9,-2.3)
  silkscreen extent 3.65,-3.25 4.15,-2.75, body extent 0.15,-6 6.45,6, height 0.8
KXT_series_switch_3.5x2.0mm [mm] "Single pole switch; Body 3.5x 2.0 mm (LxW typ)"
  rect 0.6x1.5 smd paste+0 mask+0.05: 1(-1.6,0) 2(1.6,0)
  silkscreen extent -1.5,-1.15 1.5,1.15, body extent -1.5,-1 1.5,1, height 0.8
L4818 [mm] "L4818 Size for LPS4018"
  rect 4.5x2 smd mask+0.05: 1(0,1.753) 2(0,-1.753)
  silkscreen extent -2.25,-0.3 2.25,0.35
"Logo ESD" [mil] "Logo ESD"
  silkscreen extent 0,0 330,302, body extent -1,-1 331,303, height 4
"LOGO LORA SIZE3" [mil] "Logo LoRa Size3 - Top Overlay - 14.5x8mm - Registered"
  silkscreen extent 0,-96 474,195, body extent 91,-4 207,104, height 31
"Logo Recycling1" [mil] "Logo Recycling1"
  silkscreen extent 2,-35 369,323, body extent 2,-35 369,323, height 4
logo_semtech_horiz_size2 [mil] "Logo semtech horizontal - size2 - M"
  silkscreen extent 0,-1 700,148, body extent 0,-2 700,148
logo_semtech_horiz_size3 [mil] "Logo semtech horizontal - size3 - L"
  silkscreen extent 0,0 1000,213
"MLPD-8 3X3MM" [mm] "MLPD-8; 3.0x3.0mm; 0.65mm pitch"
  rect 0.75x0.4 smd mask+0.05: 1(-1.475,0.975) 2(-1.475,0.325) 3(-1.475,-0.325) 4(-1.475,-0.975) 5(1.475,-0.975) 6(1.475,-0.325) 7(1.475,0.325) 8(1.475,0.975)
  rect 1.7x2.58 smd paste+0 mask+0.05: 9(0,0)
  silkscreen extent -1.8,-1.65 1,1.65, body extent -1.5,-1.5 1.5,1.5, height 1
MLPQ-UT8 [mm]
  oval 0.75x0.2 smd mask+0.05: 1(-0.725,0.4) 2(-0.725,0) 3(-0.725,-0.4) 5(0.725,-0.4) 6(0.725,0) 7(0.725,0.4)
  oval 0.2x0.75 smd mask+0.05: 4(0,-0.725) 8(0,0.725)
  silkscreen extent -1.77,-0.85 0.75,0.85, body extent -0.8,-0.75 0.75,0.8, height 0.6
MLPQ-W18 [mil] "MLPQ-W18 ; 2mm x 3mm"
  rect 31x8 smd mask+1.97: 1(-37.89,47.24) 2(-37.89,31.5) 3(-37.89,15.75) 4(-37.89,0) 5(-37.89,-15.75) 6(-37.89,-31.5) 7(-37.89,-47.24) 10(37.89,-47.24) 11(37.89,-31.5) 12(37.89,-15.75) 13(37.89,0) 14(37.89,15.75) 15(37.89,31.5) 16(37.89,47.24)
  rect 8x31 smd mask+1.97: 8(-7.87,-57.58) 9(7.87,-57.58) 17(7.87,57.58) 18(-7.87,57.58)
  rect 11x28 smd mask+1.97: 19(0,19.69) 20(0,-19.69)
  silkscreen extent -73,-71 47,71, body extent -55,-75 55,75, height 39
pin_1mm [mm] "Generic Pin 1.1mm; 1 Lead"
  round 1.7 hole 1 paste+0 mask+0.05: 1(0,0)
PIN_SMD [mm] "Generic Pin SMD; 1 Lead"
  round 0.6 smd paste-3: 1(0,0)
rlc_201_smd [mm] "Chip SMD component 201; Body 0.6 x 0.3 mm (LxW typ)"
  rect 0.4x0.35 smd mask+0.05: 1(-0.35,0) 2(0.35,0)
RLC_402_SMD [mm] "Chip SMD component 402; Body 1.0 x 0.5 mm (LxW typ)"
  rect 0.65x0.65 smd mask+0.05: 1(-0.55,0) 2(0.55,0)
  body extent -0.87,-0.33 0.87,0.33, height 0.8
rlc_402_smd [mm] "Chip SMD component 402; Body 1.0 x 0.5 mm (LxW typ)"
  rect 0.65x0.65 smd mask+0.05: 1(-0.55,0) 2(0.55,0)
  body extent -0.87,-0.33 0.87,0.33, height 0.8
rlc_603_smd [mm] "Chip SMD component 603; Body 1.6 x 0.8mm (LxW typ)"
  rect 0.9x0.9 smd paste+0 mask+0.05: 1(-0.75,0) 2(0.75,0)
rlc_805_smd [mm] "Chip SMD component 805; Body 2.0 x 1.25 mm (LxW typ)"
  rect 1.3x1.3 smd mask+0.05: 1(-0.9,0) 2(0.9,0)
SLP1006P2T [mm] "Chip TVS Diode; Body 1.0 x 0.6 mm (LxW typ)"
  rect 0.55x0.6 smd mask+0.05: 1(-0.425,0) 2(0.425,0)
  silkscreen extent 0.9,-0.25 0.9,0.25, body extent -0.5,-0.3 0.5,0.3, height 0.8
SMA_END_LAUNCH_1.6MM_6.35MM [mm] "SMA end launch for 1.6mm PCB thickness; 6.35mm"
  rect 4.2x1.778 smd mask+0.05: 1(0,0)
  rect 4.2x2.667 hole 0.3 mask+0.05: 2(0,-3.495) 2(0,3.495)
SOD523 [mm] "SOD523; Chip Diode; Body 1.2 x 0.8 mm (LxW typ)"
  rect 0.5x0.4 smd mask+0.05: 1(-0.66,0) 2(0.66,0)
  silkscreen extent -1.1,-0.2 -1.1,0.2, body extent -0.6,-0.4 0.6,0.4, height 0.8
"TCXO 2.0X1.6MM" [mm] "SMD 2.0x1.6mm for TCXO or VCTCXO"
  rect 0.6x0.8 smd mask+0.05: 1(-0.9,-0.6) 2(0.9,-0.6) 3(0.9,0.6) 4(-0.9,0.6)
  silkscreen extent -1.05,-1.45 -0.75,-1.15, body extent -1,-0.8 1,0.8, height 1
"TCXO 2.5X2.0MM" [mm] "SMD 2.5x2.0mm for TCXO or VCTCXO"
  rect 0.9x0.9 smd mask+0.05: 1(-0.95,-0.75) 2(0.95,-0.75) 3(0.95,0.75) 4(-0.95,0.75)
  silkscreen extent -1.1,-1.65 -0.8,-1.35, body extent -1.25,-1 1.25,1, height 1
UFQFPN48_7X7MM [mm] "UFQFPN48 Leads, Body 7.0x7.0mm, Pitch 0.50mm"
  rrect10% 0.6x0.3 smd mask+0.05: 1(-3.4,2.75) 2(-3.4,2.25) 3(-3.4,1.75) 4(-3.4,1.25) 5(-3.4,0.75) 6(-3.4,0.25) 7(-3.4,-0.25) 8(-3.4,-0.75) 9(-3.4,-1.25) 10(-3.4,-1.75) 11(-3.4,-2.25) 12(-3.4,-2.75) 25(3.4,-2.75) 26(3.4,-2.25) 27(3.4,-1.75) 28(3.4,-1.25) 29(3.4,-0.75) 30(3.4,-0.25) 31(3.4,0.25) 32(3.4,0.75) 33(3.4,1.25) 34(3.4,1.75) 35(3.4,2.25) 36(3.4,2.75)
  rrect10% 0.3x0.6 smd mask+0.05: 13(-2.75,-3.4) 14(-2.25,-3.4) 15(-1.75,-3.4) 16(-1.25,-3.4) 17(-0.75,-3.4) 18(-0.25,-3.4) 19(0.25,-3.4) 20(0.75,-3.4) 21(1.25,-3.4) 22(1.75,-3.4) 23(2.25,-3.4) 24(2.75,-3.4) 37(2.75,3.4) 38(2.25,3.4) 39(1.75,3.4) 40(1.25,3.4) 41(0.75,3.4) 42(0.25,3.4) 43(-0.25,3.4) 44(-0.75,3.4) 45(-1.25,3.4) 46(-1.75,3.4) 47(-2.25,3.4) 48(-2.75,3.4)
  rrect5% 5.6x5.6 smd paste-5.2 mask+0.05: 49(0,0)
  Mechanical 15 keep-out lines w0.1: 3.85,3.85 3.85,-3.85 -3.85,-3.85 -3.85,3.85 3.85,3.85
  silkscreen extent -3.65,-3.65 3.65,3.65, body extent -3.5,-3.5 3.5,3.5, height 1
"VQFN24_4X4MM RF" [mm] "24 Leads, Body 4.0x4.0mm, Pitch 0.50mm, VQFN24; for RF design"
  oval 0.8x0.3 smd mask+0.05: 1(-1.9,1.25) 2(-1.9,0.75) 3(-1.9,0.25) 4(-1.9,-0.25) 5(-1.9,-0.75) 6(-1.9,-1.25) 13(1.9,-1.25) 14(1.9,-0.75) 15(1.9,-0.25) 16(1.9,0.25) 17(1.9,0.75) 18(1.9,1.25)
  oval 0.3x0.8 smd mask+0.05: 7(-1.25,-1.9) 8(-0.75,-1.9) 9(-0.25,-1.9) 10(0.25,-1.9) 11(0.75,-1.9) 12(1.25,-1.9) 19(1.25,1.9) 20(0.75,1.9) 21(0.25,1.9) 22(-0.25,1.9) 23(-0.75,1.9) 24(-1.25,1.9)
  rrect5% 2.5x2.5 smd paste-2.5 mask+0.05: 25(0,0)
  Mechanical 15 keep-out lines w0.1: -2.5,-2.5 -2.5,2.5 2.5,2.5 2.5,-2.5 -2.5,-2.5
  silkscreen extent -2.8,-2.2 2.2,2.2, body extent -2,-2 2,2, height 1
VQFN32_5X5MM [mm] "32 Leads, Body 5.0x5.0mm, Pitch 0.50mm, VQFN32"
  oval 0.8x0.3 smd mask+0.05: 1(-2.4,1.75) 2(-2.4,1.25) 3(-2.4,0.75) 4(-2.4,0.25) 5(-2.4,-0.25) 6(-2.4,-0.75) 7(-2.4,-1.25) 8(-2.4,-1.75) 17(2.4,-1.75) 18(2.4,-1.25) 19(2.4,-0.75) 20(2.4,-0.25) 21(2.4,0.25) 22(2.4,0.75) 23(2.4,1.25) 24(2.4,1.75)
  oval 0.3x0.8 smd mask+0.05: 9(-1.75,-2.4) 10(-1.25,-2.4) 11(-0.75,-2.4) 12(-0.25,-2.4) 13(0.25,-2.4) 14(0.75,-2.4) 15(1.25,-2.4) 16(1.75,-2.4) 25(1.75,2.4) 26(1.25,2.4) 27(0.75,2.4) 28(0.25,2.4) 29(-0.25,2.4) 30(-0.75,2.4) 31(-1.25,2.4) 32(-1.75,2.4)
  rrect5% 3.4x3.4 smd paste-3.2 mask+0.05: 33(0,0)
  Mechanical 15 keep-out lines w0.1: 3,-3 -3,-3 -3,3 3,3 3,-3
  silkscreen extent -3,-2.7 2.7,3, body extent -2.5,-2.5 2.5,2.5, height 1
VQFN64_9X9MM [mm] "VQFN64 Leads, Body 9.0x9.0mm, Pitch 0.50mm, VQFN64"
  oval 0.9x0.25 smd mask+0.05: 1(-4.45,3.75) 2(-4.45,3.25) 3(-4.45,2.75) 4(-4.45,2.25) 5(-4.45,1.75) 6(-4.45,1.25) 7(-4.45,0.75) 8(-4.45,0.25) 9(-4.45,-0.25) 10(-4.45,-0.75) 11(-4.45,-1.25) 12(-4.45,-1.75) 13(-4.45,-2.25) 14(-4.45,-2.75) 15(-4.45,-3.25) 16(-4.45,-3.75) 33(4.45,-3.75) 34(4.45,-3.25) 35(4.45,-2.75) 36(4.45,-2.25) 37(4.45,-1.75) 38(4.45,-1.25) 39(4.45,-0.75) 40(4.45,-0.25) 41(4.45,0.25) 42(4.45,0.75) 43(4.45,1.25) 44(4.45,1.75) 45(4.45,2.25) 46(4.45,2.75) 47(4.45,3.25) 48(4.45,3.75)
  oval 0.25x0.9 smd mask+0.05: 17(-3.75,-4.45) 18(-3.25,-4.45) 19(-2.75,-4.45) 20(-2.25,-4.45) 21(-1.75,-4.45) 22(-1.25,-4.45) 23(-0.75,-4.45) 24(-0.25,-4.45) 25(0.25,-4.45) 26(0.75,-4.45) 27(1.25,-4.45) 28(1.75,-4.45) 29(2.25,-4.45) 30(2.75,-4.45) 31(3.25,-4.45) 32(3.75,-4.45) 49(3.75,4.45) 50(3.25,4.45) 51(2.75,4.45) 52(2.25,4.45) 53(1.75,4.45) 54(1.25,4.45) 55(0.75,4.45) 56(0.25,4.45) 57(-0.25,4.45) 58(-0.75,4.45) 59(-1.25,4.45) 60(-1.75,4.45) 61(-2.25,4.45) 62(-2.75,4.45) 63(-3.25,4.45) 64(-3.75,4.45)
  rrect5% 7.2x7.2 smd paste-6.6 mask+0.05: 65(0,0)
  Mechanical 15 keep-out lines w0.1: -4.5,-4.5 4.5,-4.5 4.5,4.5 -4.5,4.5 -4.5,-4.5
  silkscreen extent -5.25,-4.75 4.75,4.75, body extent -4.5,-4.5 4.5,4.5, height 1

## Part data
868MHz 915MHz Other R102 R103 R105 R106 R108 R110 R111 R112 R113 R114 R115 R202 R203 R204 R205 R206 R207 R208 R601 R602 R603 R604 R605 R606 R607 R801 R802 R807 R808 R809: "Resistor SMD - IEC symbol version"
BOOT0 NRST: library part SW-SPST, "SPST, N.O. - Tactile Switch"
C100 C101 C102 C104 C105 C106 C107 C108 C109 C110 C111 C112 C113 C114 C115 C201 C202 C203 C204 C205 C206 C207 C208 C209 C210 C211 C601 C602 C603 C604 C605 C606 C607 C608 C609 C610 C611 C612 C800 C801 C802 C803 C804 C805 C806 C807 C808 C813 C814 C815 C816 C817 C818 C819 C820 C821 C822 C823 C824 C825 C826 C827 C828 C829 C830 C831 C832 C900 C901 C903 C904 C905 C906 C907 C908: "Capacitor SMD"
D201 D202 D203 D204 D801: "Ultra Low Capacitance 1-line ESD Protection"
D800 D900: "Schottky Diode"
"Fiducial Mark1" "Logo ESD 2" "Logo LoRa 1" "Logo LoRa 2" "Logo Recycling2" "Logo Semtech 1" "Logo Semtech 2": library part Logo, "Schematic symbol for Logo"
GND1 GPIO_DBG1 GPIO_DBG2 PacketSent_IRQ RADIO2_RST SPI2_MISO SPI2_MOSI SPI2_NSS SPI2_SCK USART_RX USART_TX: library part test_pin
MCU_H SPI_H: "Header, 6-Pin"
R100_A R101_B: "Mini-Flat Package, Isolated Resistor Network, 0.031 W/resistor"
RFIO: "SMA Straight Connector"
U100: library part SX1301, "SX1301 - Base Band Processor for Data Concentrator for Long Range Communication Network; Apps Pinout"
U201: "SC283 - Dual Channel 2.5MHz, 1.8A  Synchronous Step-Down Regulator"
U202: "SC560H - Dual Output Low Noise LDO  Linear Regulator"
U203: "SC4212 - Very Low Input /Very Low Dropout  1Amp Regulator With Enable"
U601: "STM32 ARM Cortex M4 32-bit MCU with 256Kbytes Flash/96kB RAM, UFQFPN48 package"
U602: "TO136 - Secure Element designed for IoT and M2M applications."
U800 U900: "SX1257 RF Front-End Transceiver - I/Q New Pinout"
U801 U803 U805: "SAW Filter - Bandpass - TEMEX type"
U802: "SE2435L - Skyworks High Power RF Front End Module"
USB_DC_IN: "USB 2.0 SMT, Type A, Receptacle, 4 Position"
Y100: library part VCTCXO, "VCTCXO"

## Free pads (board coordinates)
  round 60 hole 82.68 unplated paste-78.74 mask+1.97: 0(2755.91,137.8) 0(2755.91,1082.68)

## Via types
v1: diameter 23.62, hole 11.81, Top Layer to Bottom Layer, tented both sides, 584 vias
v2: diameter 19.68, hole 9.84, Top Layer to Bottom Layer, tented both sides, 166 vias
v3: diameter 23.62, hole 11.81, Top Layer to Bottom Layer, tented top, 89 vias
v4: diameter 19.68, hole 10, Top Layer to Bottom Layer, tented top, 16 vias
v5: diameter 25.59, hole 11.81, Top Layer to Bottom Layer, tented both sides, 3 vias
v6: diameter 18.9, hole 9.84, Top Layer to Bottom Layer, tented both sides, 1 vias

## Nets (pads, with @x,y where several pads share a name; then routed paths per layer and width w, separated by ;. In a path a pad name is that pad's centre, name@x,y a point inside that pad or via, vN(x,y) a via of type N, cw(c..) or ccw(c..) an arc to the next point about the centre after c; other vN are vias at no path point)
133M_OUT_EN: R606.2 U601.20 Y100.1 | length 1086.7
  Top Layer w5.91: U601.20@395.67,417.32 v2(395.67,440.94)
  Top Layer w7.87: Y100.1@982.28,905.51 R606.2@1021.65,905.51 ; v2(1021.65,881.89) R606.2@1021.65,905.51 ; R606.2@1023.62,905.51 R606.2@1021.65,905.51
  Bottom Layer w5.91: v2(395.67,440.94) 395.67,466.54 405.51,476.38 425.27,496.14 462.94,496.14 496.56,462.52 516.06,462.52 590.63,537.09 590.63,769.76 616.06,795.2 743.03,795.2 799.29,851.46 1008.94,851.46 1021.65,864.17 v2(1021.65,881.89)
+5V: C201.1 C204.1 C205.1 C208.1 FB201.2 FB205.1 R204.1 R205.1 R208.1 U201.1 U201.5 U201.8 U201.10 U201.14 U201.15 U201.16 U201.17 U202.2 U601.30 | length 407.8
  Top Layer w5.91: v2(219.49,303.15) 229.33,293.31 U601.30@291.34,293.31
  Top Layer w19.68: R208.1@1047.24,106.3 v2(1047.24,122.05)
  MidLayer2 - Power w19.68: v2(513.78,937.01) 513.78,954.72
  Bottom Layer w5.91: U201.5@537.4,883.86 522.4,883.86 513.78,892.48 v2(513.78,937.01) 513.78,938.98 523.62,948.82 555.12,948.82 567.42,936.52 U201.8@567.42,925.69 ; U201.17@582.68,805.12 v2(598.43,805.12) 609.25,805.12 613.18,809.05 U201.16@613.18,820.87 ; U201.16@613.18,821.84 U201.15@613.18,836.61 ; U201.15@613.18,836.82 U201.14@613.18,852.36
  Bottom Layer w11.81: C208.1@1715.71,263.78 U202.2@1784.61,263.78 U202.2@1792.48,263.78
  other v1: 1708.66,236.22 1692.91,261.81 1714.57,285.43 273.62,559.06 301.18,559.06 273.62,588.58 301.18,588.58 444.88,753.94 476.38,753.94 47.24,783.46 74.8,783.46 151.57,783.46 503.94,789.37 49.21,901.57 88.58,901.57 139.76,901.57 179.13,901.57 647.64,944.88 677.17,986.22 704.72,986.22 1824.8,1078.74 1803.15,1106.3 1832.68,1106.3
  other v2: 179.13,785.43
BOOT0: BOOT0.1 R602.2 U601.44 | length 1193.3
  Top Layer w5.91: R602.2@454.72,118.11 U601.44@454.72,149.61 ; R602.2@458.66,118.11 472.44,118.11 478.11,112.44 478.11,86.1 514.09,50.12 1447.76,50.12 v2(1509.84,112.2)
  Bottom Layer w5.91: v2(1509.84,112.2) BOOT0.1@1509.84,153.54
CLKHS: R102.1 U100.53 | length 67.9
  Top Layer w9.84: R102.1@907.48,763.78 919.29,751.97 U100.53@919.29,700.79
CLKI: R113.2 U800.11 | length 86.1
  Top Layer w9.84: R113.2@1224.41,783.46 1242.13,765.75 U800.11@1303.15,765.75
CLKO_B: R111.2 R112.2 U900.10 | length 126.7
  Top Layer w10.12: R111.2@1224.41,442.91 R112.2@1224.41,405.51 1246.06,383.86 1261.81,383.86 1265.75,379.92 U900.10@1303.15,379.92
CLKO_B_32M: R112.1 U601.5 | length 705.3
  Top Layer w9.84: U601.5@559.06,253.94 618.11,253.94 618.19,254.02 673.15,254.02 697.83,229.33 v2(699.8,229.33) ; v2(1153.54,405.51) R112.1@1181.1,405.51
  Bottom Layer w9.84: v2(699.8,229.33) 936.02,229.33 1112.2,405.51 v2(1153.54,405.51)
FEM_EN: C606.2 R601.2 R607.2 U203.2 U802.1 | length 627.2
  Top Layer w5.91: v2(1750,901.57) v2(1750,972.44) ; U802.1@2120.08,726.38 v2(2120.08,742.13)
  Bottom Layer w5.91: v2(1750,901.57) 1750,885.83 1755.98,879.84 2023.7,879.84 2037.4,866.14 R601.2@2037.4,848.43 ; v2(1750,972.44) U203.2@1779.53,972.44 ; R607.2@2070.87,848.43 R601.2@2037.4,848.43 ; v2(2120.08,742.13) 2070.87,791.34 2057.09,791.34 C606.2@2037.4,811.02 R601.2@2037.4,848.43